# Altium PCB 多通道.PcbDoc (part 1 of 2)
Units mm, origin at the board's own origin, x right, y up, seen from the top; angles counter-clockwise.
Board outline 95 x 34 mm, 2 copper layers (Top Layer, Bottom Layer); 165 components, 129 nets, 558 pads, 145 vias.
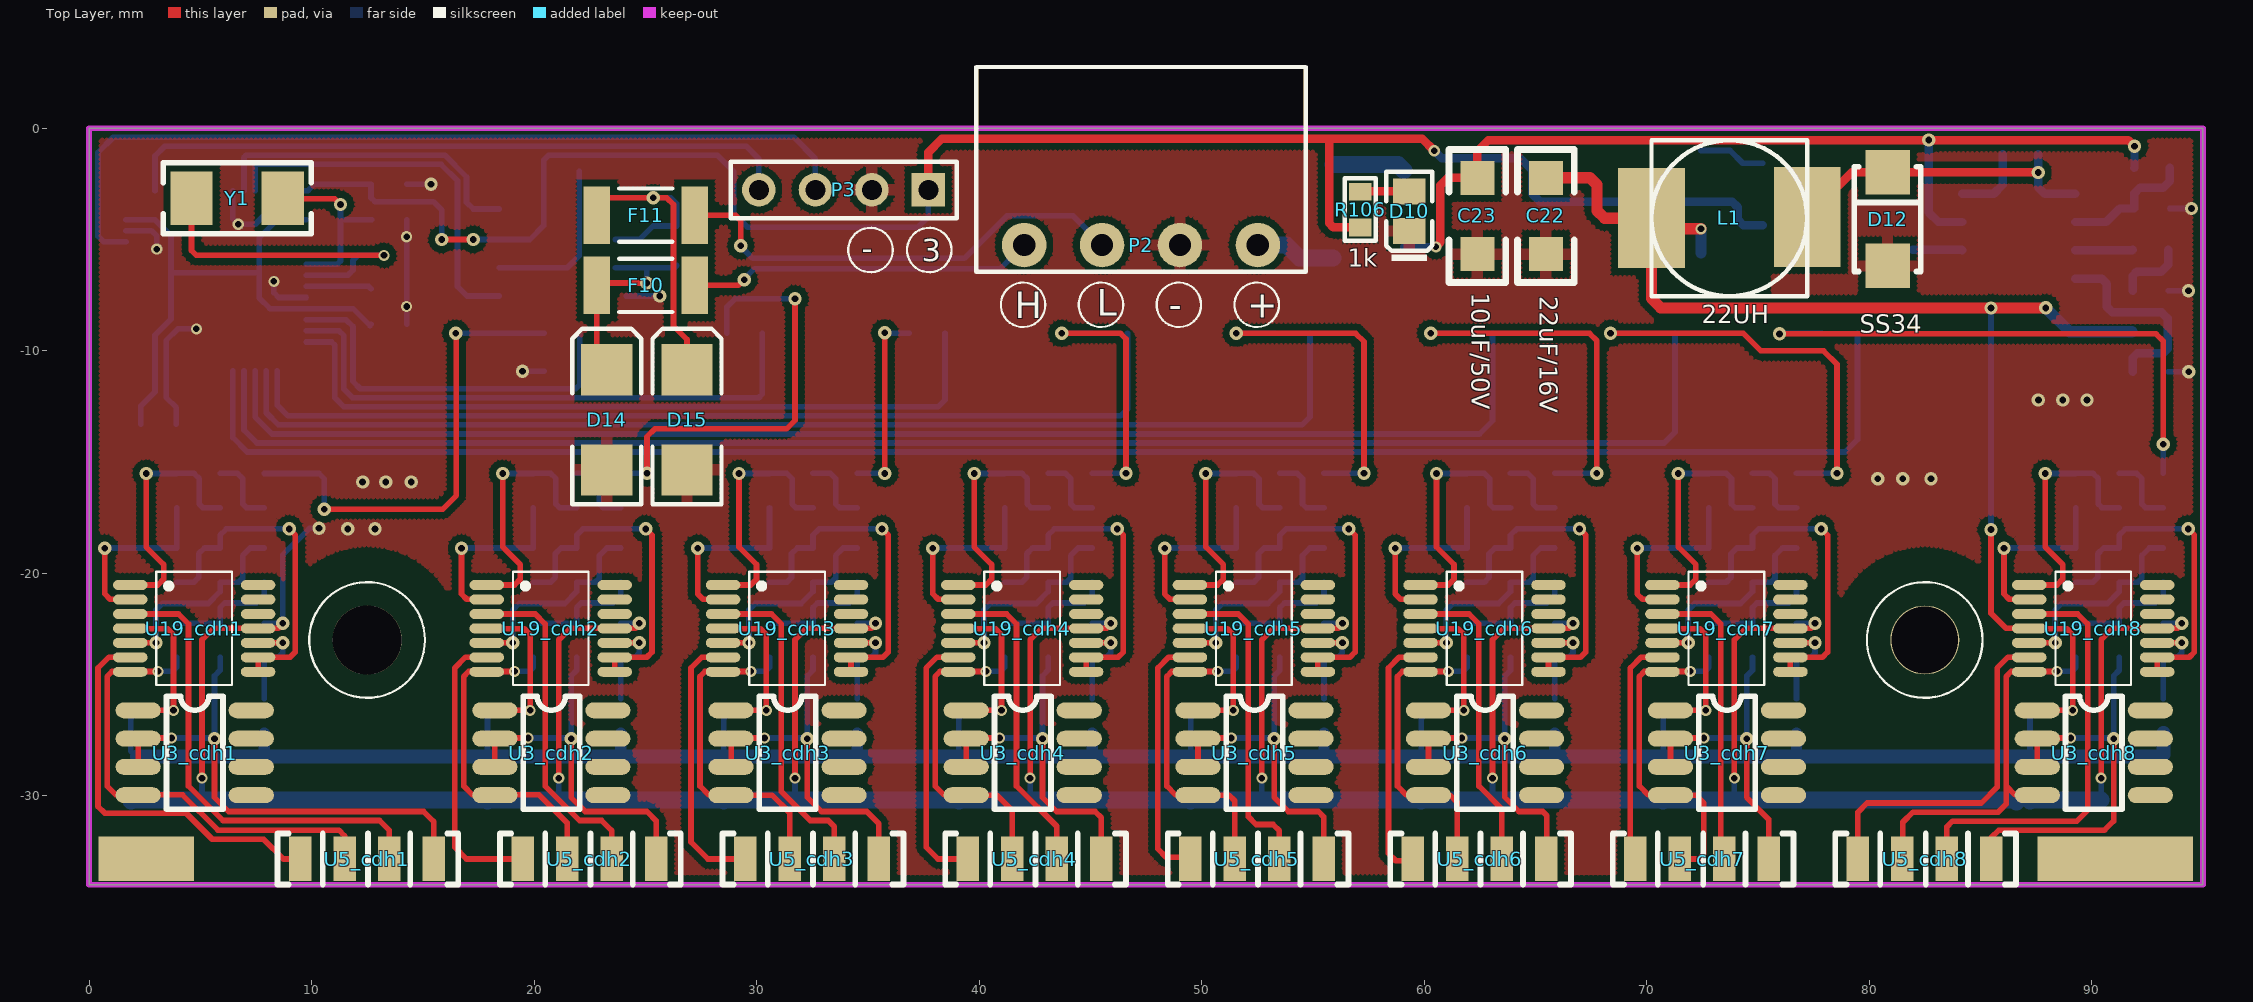
[diagram p0: Top Layer view]
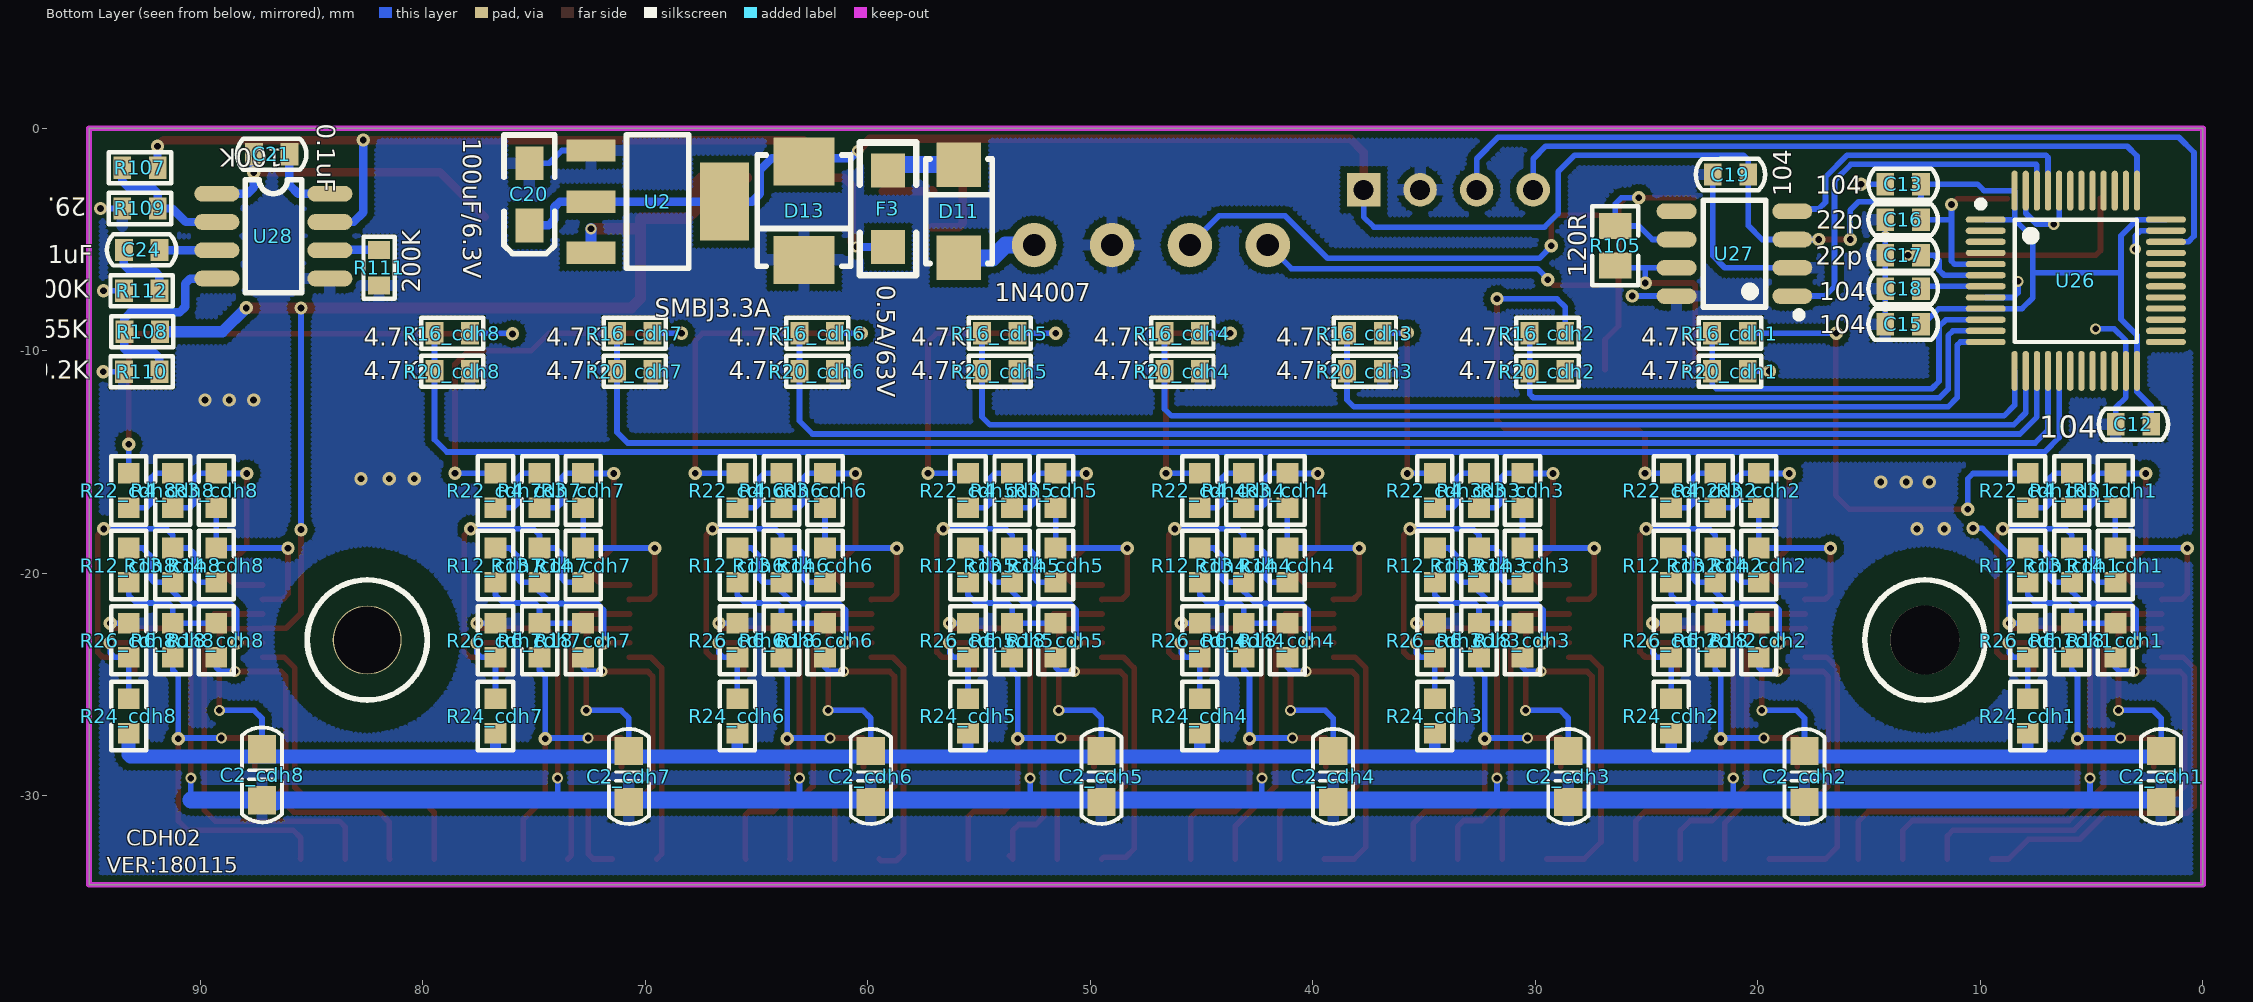
[diagram p1: Bottom Layer view, seen from below]
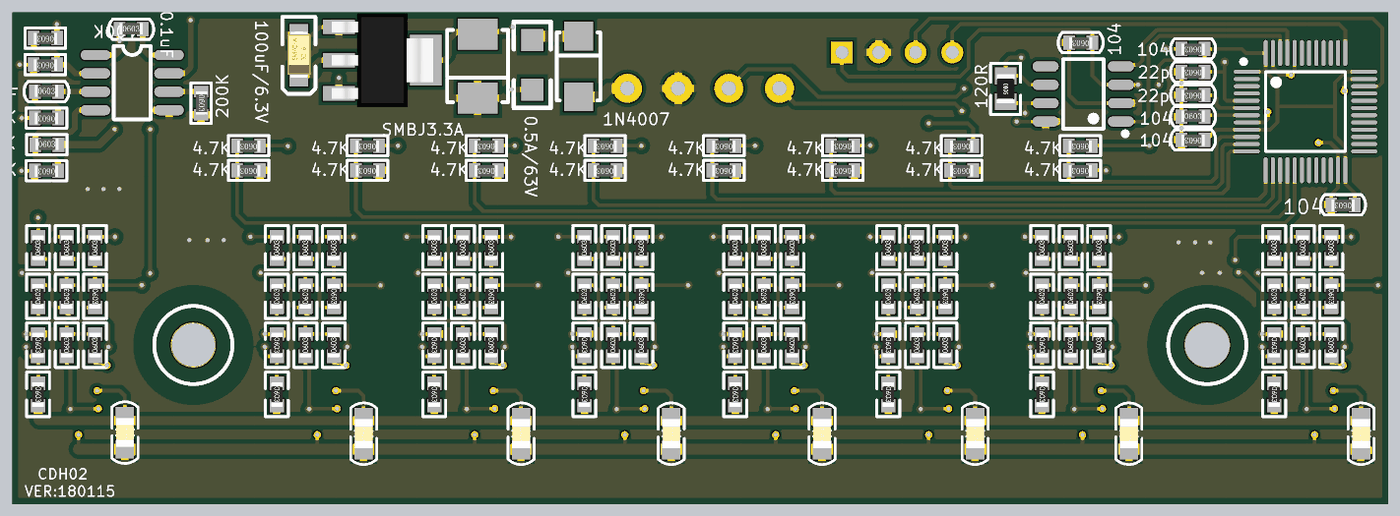
[diagram p3: 3D render of the assembled board from below, using the file's embedded part models]

## Layer stack, top to bottom
Top Layer: signal copper 0.0356
Dielectric: dielectric 0.32, FR-4, Dk 4.8
Bottom Layer: signal copper 0.0356

## Board outline
0,-34 0,0 95,0 95,-34

## Design rules (kind name [scope] priority, off if disabled: settings)
Clearance luosi [HasPad('Free-2')or HasPad('Free-3') vs InPolygon] p1: gap=2.6
Clearance inpolog [InPolygon] p2: gap=0.3
Clearance Clearance_1 [All] p3: gap=0.152
HoleSize [All] p1: absolutevalues=TRUE maxlimit=6 minlimit=0.025 maxpercent=80.000 minpercent=20.000
MinimumSolderMaskSliver [All] p1: minsoldermaskwidth=0
PolygonConnect PolygonConnect_1 [IsVia] p1: connectstyle=Direct reliefconductorwidth=0.254 reliefentries=4 polygonreliefangle="90 Angle"
PolygonConnect [IsPad] p2: connectstyle=Relief reliefconductorwidth=0.508 reliefentries=4 polygonreliefangle="90 Angle"
RoomDefinition 总图 [InComponentClass('总图')] p1: confinementstyle=ConfineIn formatcopy=TRUE lockcomponents=FA outline -414.128,-262.651 -363.328,-262.651 -363.328,-237.251 -414.128,-237.251
RoomDefinition cdh8 [InComponentClass('cdh8')] p2: confinementstyle=ConfineIn formatcopy=TRUE lockcomponents=FALSE outline -414.128,-262.651 -363.328,-262.651 -363.328,-237.251 -414.128,-237.251
RoomDefinition cdh7 [InComponentClass('cdh7')] p3: confinementstyle=ConfineIn formatcopy=TRUE lockcomponents=FALSE outline -414.128,-262.651 -363.328,-262.651 -363.328,-237.251 -414.128,-237.251
RoomDefinition cdh6 [InComponentClass('cdh6')] p4: confinementstyle=ConfineIn formatcopy=TRUE lockcomponents=FALSE outline -414.128,-262.651 -363.328,-262.651 -363.328,-237.251 -414.128,-237.251
RoomDefinition cdh5 [InComponentClass('cdh5')] p5: confinementstyle=ConfineIn formatcopy=TRUE lockcomponents=FALSE outline -414.128,-262.651 -363.328,-262.651 -363.328,-237.251 -414.128,-237.251
RoomDefinition cdh4 [InComponentClass('cdh4')] p6: confinementstyle=ConfineIn formatcopy=TRUE lockcomponents=FALSE outline -414.128,-262.651 -363.328,-262.651 -363.328,-237.251 -414.128,-237.251
RoomDefinition cdh3 [InComponentClass('cdh3')] p7: confinementstyle=ConfineIn formatcopy=TRUE lockcomponents=FALSE outline -414.128,-262.651 -363.328,-262.651 -363.328,-237.251 -414.128,-237.251
RoomDefinition cdh2 [InComponentClass('cdh2')] p8: confinementstyle=ConfineIn formatcopy=TRUE lockcomponents=FALSE outline -414.128,-262.651 -363.328,-262.651 -363.328,-237.251 -414.128,-237.251
RoomDefinition cdh1 [InComponentClass('cdh1')] p9: confinementstyle=ConfineIn formatcopy=TRUE lockcomponents=FALSE outline -414.128,-262.651 -363.328,-262.651 -363.328,-237.251 -414.128,-237.251
RoutingVias [All] p1: holewidth=0.711 width=1.27 viastyle="Through Hole" minholewidth=0.711 minwidth=1.27 maxholewidth=0.711 maxwidth=1.27
SilkToSilkClearance [All] p1: silktosilkclearance=-10
SilkscreenOverComponentPads [IsPad] p1: minsilkscreentomaskgap=-10
SolderMaskExpansion [All] p1: expansion=0.102
Width [All] p1: maxlimit=1.27 minlimit=0.152 preferedwidth=0.254
24 further rules are at their usual default settings.

## Classes and differential pairs
component class 总图: C12 C13 C15 C16 C17 C18 C19 C20 C21 C22 C23 C24 D10 D11 D12 D13 D14 D15 F3 F10 F11 L1 P2 P3 R105 R106 R107 R108 R109 R110 R111 R112 U2 U26 U27 U28 Y1
channel class cdh: cdh1 cdh2 cdh3 cdh4 cdh5 cdh6 cdh7 cdh8
component class cdh1: C2_cdh1 R3_cdh1 R4_cdh1 R6_cdh1 R12_cdh1 R13_cdh1 R14_cdh1 R16_cdh1 R18_cdh1 R20_cdh1 R22_cdh1 R24_cdh1 R26_cdh1 U3_cdh1 U5_cdh1 U19_cdh1
component class cdh4: C2_cdh4 R3_cdh4 R4_cdh4 R6_cdh4 R12_cdh4 R13_cdh4 R14_cdh4 R16_cdh4 R18_cdh4 R20_cdh4 R22_cdh4 R24_cdh4 R26_cdh4 U3_cdh4 U5_cdh4 U19_cdh4
component class cdh7: C2_cdh7 R3_cdh7 R4_cdh7 R6_cdh7 R12_cdh7 R13_cdh7 R14_cdh7 R16_cdh7 R18_cdh7 R20_cdh7 R22_cdh7 R24_cdh7 R26_cdh7 U3_cdh7 U5_cdh7 U19_cdh7
component class cdh8: C2_cdh8 R3_cdh8 R4_cdh8 R6_cdh8 R12_cdh8 R13_cdh8 R14_cdh8 R16_cdh8 R18_cdh8 R20_cdh8 R22_cdh8 R24_cdh8 R26_cdh8 U3_cdh8 U5_cdh8 U19_cdh8
component class cdh2: C2_cdh2 R3_cdh2 R4_cdh2 R6_cdh2 R12_cdh2 R13_cdh2 R14_cdh2 R16_cdh2 R18_cdh2 R20_cdh2 R22_cdh2 R24_cdh2 R26_cdh2 U3_cdh2 U5_cdh2 U19_cdh2
component class cdh3: C2_cdh3 R3_cdh3 R4_cdh3 R6_cdh3 R12_cdh3 R13_cdh3 R14_cdh3 R16_cdh3 R18_cdh3 R20_cdh3 R22_cdh3 R24_cdh3 R26_cdh3 U3_cdh3 U5_cdh3 U19_cdh3
component class cdh5: C2_cdh5 R3_cdh5 R4_cdh5 R6_cdh5 R12_cdh5 R13_cdh5 R14_cdh5 R16_cdh5 R18_cdh5 R20_cdh5 R22_cdh5 R24_cdh5 R26_cdh5 U3_cdh5 U5_cdh5 U19_cdh5
component class cdh6: C2_cdh6 R3_cdh6 R4_cdh6 R6_cdh6 R12_cdh6 R13_cdh6 R14_cdh6 R16_cdh6 R18_cdh6 R20_cdh6 R22_cdh6 R24_cdh6 R26_cdh6 U3_cdh6 U5_cdh6 U19_cdh6
net class CDH[1..8]: CDH1 CDH2 CDH3 CDH4 CDH5 CDH6 CDH7 CDH8

## Components (designator, comment, footprint, x,y, rotation, side; value= is the part's Value field where it differs from the comment)
C2_cdh1 "0.1uF" C0805 1.88,-29.134 r90 bottom (schematic designator C2)
C2_cdh2 "0.1uF" C0805 17.907,-29.134 r90 bottom (schematic designator C2)
C2_cdh3 "0.1uF" C0805 28.524,-29.134 r90 bottom (schematic designator C2)
C2_cdh4 "0.1uF" C0805 39.091,-29.134 r90 bottom (schematic designator C2)
C2_cdh5 "0.1uF" C0805 49.505,-29.134 r90 bottom (schematic designator C2)
C2_cdh6 "0.1uF" C0805 59.868,-29.134 r90 bottom (schematic designator C2)
C2_cdh7 "0.1uF" C0805 70.739,-29.134 r90 bottom (schematic designator C2)
C2_cdh8 "0.1uF" C0805 87.224,-29.058 r90 bottom (schematic designator C2)
C12 "104" 0603-CAP 3.124,-13.31 r0 bottom
C13 "104" 0603-CAP 13.475,-2.515 r0 bottom
C15 "104" 0603-CAP 13.475,-8.814 r0 bottom
C16 "22p" 0603-CAP 13.475,-4.115 r0 bottom
C17 "22p" 0603-CAP 13.475,-5.715 r0 bottom
C18 "104" 0603-CAP 13.475,-7.214 r180 bottom
C19 "104" 0603-CAP 21.234,-2.083 r0 bottom
C20 "100uF/6.3V" 3216 75.209,-2.972 r270 bottom
C21 "0.1uF" 0603-CAP 86.792,-1.168 r180 bottom
C22 "22uF/16V" 1206 65.456,-5.664 r90 top
C23 "10uF/50V" 1206 62.408,-2.224 r270 top
C24 "0.1uF" 0603-CAP 92.634,-5.471 r180 bottom
D10 "LED0" LC-0805_LED_S1 59.334,-2.845 r90 top
D11 "1N4007" SMA(DO-214AC)_S1 55.905,-3.734 r270 bottom
D12 "SS34" SMA(DO-214AC)_S1 80.823,-4.089 r270 top
D13 "SMBJ3.3A" SMB(DO-214AA)_S1 62.865,-3.708 r90 bottom
D14 "D Schottky" SMB 23.266,-13.106 r90 top
D15 "D Schottky" SMB 26.873,-13.106 r90 top
F3 "0.5A/63V" 1206 59.08,-1.905 r270 bottom
F10 "Fuse" 12Z-2010 25.019,-7.061 r180 top
F11 "Fuse" 12Z-2010 25.019,-3.912 r180 top
L1 "22UH" L-7*7*4mm-S 77.216,-7.544 r180 top
P2 "Header 4" DZ-4-3.5 52.527,-5.251 r180 top
P3 "Header 4" HDR1X4 37.719,-2.769 r180 top
R3_cdh1 "200K" 0603_R 3.937,-16.281 r90 bottom (schematic designator R3)
R3_cdh2 "200K" 0603_R 19.964,-16.281 r90 bottom (schematic designator R3)
R3_cdh3 "200K" 0603_R 30.582,-16.281 r90 bottom (schematic designator R3)
R3_cdh4 "200K" 0603_R 41.148,-16.281 r90 bottom (schematic designator R3)
R3_cdh5 "200K" 0603_R 51.562,-16.281 r90 bottom (schematic designator R3)
R3_cdh6 "200K" 0603_R 61.925,-16.281 r90 bottom (schematic designator R3)
R3_cdh7 "200K" 0603_R 72.796,-16.281 r90 bottom (schematic designator R3)
R3_cdh8 "200K" 0603_R 89.281,-16.281 r90 bottom (schematic designator R3)
R4_cdh1 "3K" 0603_R 5.893,-16.281 r90 bottom (schematic designator R4)
R4_cdh2 "3K" 0603_R 21.92,-16.281 r90 bottom (schematic designator R4)
R4_cdh3 "3K" 0603_R 32.537,-16.281 r90 bottom (schematic designator R4)
R4_cdh4 "3K" 0603_R 43.104,-16.281 r90 bottom (schematic designator R4)
R4_cdh5 "3K" 0603_R 53.518,-16.281 r90 bottom (schematic designator R4)
R4_cdh6 "3K" 0603_R 63.881,-16.281 r90 bottom (schematic designator R4)
R4_cdh7 "3K" 0603_R 74.752,-16.281 r90 bottom (schematic designator R4)
R4_cdh8 "3K" 0603_R 91.237,-16.281 r90 bottom (schematic designator R4)
R6_cdh1 "10K" 0603_R 5.893,-23.012 r90 bottom (schematic designator R6)
R6_cdh2 "10K" 0603_R 21.92,-23.012 r90 bottom (schematic designator R6)
R6_cdh3 "10K" 0603_R 32.537,-23.012 r90 bottom (schematic designator R6)
R6_cdh4 "10K" 0603_R 43.104,-23.012 r90 bottom (schematic designator R6)
R6_cdh5 "10K" 0603_R 53.518,-23.012 r90 bottom (schematic designator R6)
R6_cdh6 "10K" 0603_R 63.881,-23.012 r90 bottom (schematic designator R6)
R6_cdh7 "10K" 0603_R 74.752,-23.012 r90 bottom (schematic designator R6)
R6_cdh8 "10K" 0603_R 91.237,-23.012 r90 bottom (schematic designator R6)
R12_cdh1 "30K" 0603_R 7.874,-19.634 r90 bottom (schematic designator R12)
R12_cdh2 "30K" 0603_R 23.901,-19.634 r90 bottom (schematic designator R12)
R12_cdh3 "30K" 0603_R 34.519,-19.634 r90 bottom (schematic designator R12)
R12_cdh4 "30K" 0603_R 45.085,-19.634 r90 bottom (schematic designator R12)
R12_cdh5 "30K" 0603_R 55.499,-19.634 r90 bottom (schematic designator R12)
R12_cdh6 "30K" 0603_R 65.862,-19.634 r90 bottom (schematic designator R12)
R12_cdh7 "30K" 0603_R 76.733,-19.634 r90 bottom (schematic designator R12)
R12_cdh8 "30K" 0603_R 93.218,-19.634 r90 bottom (schematic designator R12)
R13_cdh1 "1K" 0603_R 5.893,-19.634 r90 bottom (schematic designator R13)
R13_cdh2 "1K" 0603_R 21.92,-19.634 r90 bottom (schematic designator R13)
R13_cdh3 "1K" 0603_R 32.537,-19.634 r90 bottom (schematic designator R13)
R13_cdh4 "1K" 0603_R 43.104,-19.634 r90 bottom (schematic designator R13)
R13_cdh5 "1K" 0603_R 53.518,-19.634 r90 bottom (schematic designator R13)
R13_cdh6 "1K" 0603_R 63.881,-19.634 r90 bottom (schematic designator R13)
R13_cdh7 "1K" 0603_R 74.752,-19.634 r90 bottom (schematic designator R13)
R13_cdh8 "1K" 0603_R 91.237,-19.634 r90 bottom (schematic designator R13)
R14_cdh1 "1K" 0603_R 3.937,-19.634 r270 bottom (schematic designator R14)
R14_cdh2 "1K" 0603_R 19.964,-19.634 r270 bottom (schematic designator R14)
R14_cdh3 "1K" 0603_R 30.582,-19.634 r270 bottom (schematic designator R14)
R14_cdh4 "1K" 0603_R 41.148,-19.634 r270 bottom (schematic designator R14)
R14_cdh5 "1K" 0603_R 51.562,-19.634 r270 bottom (schematic designator R14)
R14_cdh6 "1K" 0603_R 61.925,-19.634 r270 bottom (schematic designator R14)
R14_cdh7 "1K" 0603_R 72.796,-19.634 r270 bottom (schematic designator R14)
R14_cdh8 "1K" 0603_R 89.281,-19.634 r270 bottom (schematic designator R14)
R16_cdh1 "4.7K" 0603 21.26,-9.22 r0 bottom (schematic designator R16)
R16_cdh2 "4.7K" 0603 29.462,-9.22 r0 bottom (schematic designator R16)
R16_cdh3 "4.7K" 0603 37.665,-9.22 r0 bottom (schematic designator R16)
R16_cdh4 "4.7K" 0603 45.867,-9.22 r0 bottom (schematic designator R16)
R16_cdh5 "4.7K" 0603 54.069,-9.22 r0 bottom (schematic designator R16)
R16_cdh6 "4.7K" 0603 62.272,-9.22 r0 bottom (schematic designator R16)
R16_cdh7 "4.7K" 0603 70.474,-9.22 r0 bottom (schematic designator R16)
R16_cdh8 "4.7K" 0603 78.676,-9.22 r0 bottom (schematic designator R16)
R18_cdh1 "10K" 0603_R 3.937,-23.012 r90 bottom (schematic designator R18)
R18_cdh2 "10K" 0603_R 19.964,-23.012 r90 bottom (schematic designator R18)
R18_cdh3 "10K" 0603_R 30.582,-23.012 r90 bottom (schematic designator R18)
R18_cdh4 "10K" 0603_R 41.148,-23.012 r90 bottom (schematic designator R18)
R18_cdh5 "10K" 0603_R 51.562,-23.012 r90 bottom (schematic designator R18)
R18_cdh6 "10K" 0603_R 61.925,-23.012 r90 bottom (schematic designator R18)
R18_cdh7 "10K" 0603_R 72.796,-23.012 r90 bottom (schematic designator R18)
R18_cdh8 "10K" 0603_R 89.281,-23.012 r90 bottom (schematic designator R18)
R20_cdh1 "4.7K" 0603 21.26,-10.922 r0 bottom (schematic designator R20)
R20_cdh2 "4.7K" 0603 29.462,-10.922 r0 bottom (schematic designator R20)
R20_cdh3 "4.7K" 0603 37.665,-10.922 r0 bottom (schematic designator R20)
R20_cdh4 "4.7K" 0603 45.867,-10.922 r0 bottom (schematic designator R20)
R20_cdh5 "4.7K" 0603 54.069,-10.922 r0 bottom (schematic designator R20)
R20_cdh6 "4.7K" 0603 62.272,-10.922 r0 bottom (schematic designator R20)
R20_cdh7 "4.7K" 0603 70.474,-10.922 r0 bottom (schematic designator R20)
R20_cdh8 "4.7K" 0603 78.676,-10.922 r0 bottom (schematic designator R20)
R22_cdh1 "4.7K" 0603_R 7.874,-16.281 r90 bottom (schematic designator R22)
R22_cdh2 "4.7K" 0603_R 23.901,-16.281 r90 bottom (schematic designator R22)
R22_cdh3 "4.7K" 0603_R 34.519,-16.281 r90 bottom (schematic designator R22)
R22_cdh4 "4.7K" 0603_R 45.085,-16.281 r90 bottom (schematic designator R22)
R22_cdh5 "4.7K" 0603_R 55.499,-16.281 r90 bottom (schematic designator R22)
R22_cdh6 "4.7K" 0603_R 65.862,-16.281 r90 bottom (schematic designator R22)
R22_cdh7 "4.7K" 0603_R 76.733,-16.281 r90 bottom (schematic designator R22)
R22_cdh8 "4.7K" 0603_R 93.218,-16.281 r90 bottom (schematic designator R22)
R24_cdh1 "10K" 0603_R 7.874,-26.416 r270 bottom (schematic designator R24)
R24_cdh2 "10K" 0603_R 23.901,-26.416 r270 bottom (schematic designator R24)
R24_cdh3 "10K" 0603_R 34.519,-26.416 r270 bottom (schematic designator R24)
R24_cdh4 "10K" 0603_R 45.085,-26.416 r270 bottom (schematic designator R24)
R24_cdh5 "10K" 0603_R 55.499,-26.416 r270 bottom (schematic designator R24)
R24_cdh6 "10K" 0603_R 65.862,-26.416 r270 bottom (schematic designator R24)
R24_cdh7 "10K" 0603_R 76.733,-26.416 r270 bottom (schematic designator R24)
R24_cdh8 "10K" 0603_R 93.218,-26.416 r270 bottom (schematic designator R24)
R26_cdh1 "10K" 0603_R 7.874,-23.012 r270 bottom (schematic designator R26)
R26_cdh2 "10K" 0603_R 23.901,-23.012 r270 bottom (schematic designator R26)
R26_cdh3 "10K" 0603_R 34.519,-23.012 r270 bottom (schematic designator R26)
R26_cdh4 "10K" 0603_R 45.085,-23.012 r270 bottom (schematic designator R26)
R26_cdh5 "10K" 0603_R 55.499,-23.012 r270 bottom (schematic designator R26)
R26_cdh6 "10K" 0603_R 65.862,-23.012 r270 bottom (schematic designator R26)
R26_cdh7 "10K" 0603_R 76.733,-23.012 r270 bottom (schematic designator R26)
R26_cdh8 "10K" 0603_R 93.218,-23.012 r270 bottom (schematic designator R26)
R105 "120R" 0805_R 26.416,-5.283 r270 bottom
R106 "1k" 0603 57.125,-3.658 r90 top
R107 "100K" 0603 92.71,-1.778 r0 bottom
R108 "365K" 0603 92.608,-9.144 r180 bottom
R109 "29.4K" 0603 92.71,-3.609 r0 bottom
R110 "40.2K" 0603 92.634,-10.947 r0 bottom
R111 "200K" 0603 81.966,-6.274 r270 bottom
R112 "100K" 0603 92.634,-7.302 r0 bottom
U2 "AMS1117-3.3" SOT-223 69.444,-3.302 r0 bottom
U3_cdh1 "LM317" SO-8 2.21,-26.162 r0 top (schematic designator U3)
U3_cdh2 "LM317" SO-8 18.237,-26.162 r0 top (schematic designator U3)
U3_cdh3 "LM317" SO-8 28.854,-26.162 r0 top (schematic designator U3)
U3_cdh4 "LM317" SO-8 39.421,-26.162 r0 top (schematic designator U3)
U3_cdh5 "LM317" SO-8 49.835,-26.162 r0 top (schematic designator U3)
U3_cdh6 "LM317" SO-8 60.198,-26.162 r0 top (schematic designator U3)
U3_cdh7 "LM317" SO-8 71.069,-26.162 r0 top (schematic designator U3)
U3_cdh8 "LM317" SO-8 87.554,-26.162 r0 top (schematic designator U3)
U5_cdh1 "Header 4" PIN4 9.487,-32.842 r0 top (schematic designator U5)
U5_cdh2 "Header 4" PIN4 19.487,-32.842 r0 top (schematic designator U5)
U5_cdh3 "Header 4" PIN4 29.487,-32.842 r0 top (schematic designator U5)
U5_cdh4 "Header 4" PIN4 39.487,-32.842 r0 top (schematic designator U5)
U5_cdh5 "Header 4" PIN4 49.487,-32.842 r0 top (schematic designator U5)
U5_cdh6 "Header 4" PIN4 59.487,-32.842 r0 top (schematic designator U5)
U5_cdh7 "Header 4" PIN4 69.487,-32.842 r0 top (schematic designator U5)
U5_cdh8 "Header 4" PIN4 79.487,-32.842 r0 top (schematic designator U5)
U19_cdh1 "TLC2264" TSSOP14 4.724,-22.479 r0 top (schematic designator U19)
U19_cdh2 "TLC2264" TSSOP14 20.752,-22.479 r0 top (schematic designator U19)
U19_cdh3 "TLC2264" TSSOP14 31.369,-22.479 r0 top (schematic designator U19)
U19_cdh4 "TLC2264" TSSOP14 41.935,-22.479 r0 top (schematic designator U19)
U19_cdh5 "TLC2264" TSSOP14 52.349,-22.479 r0 top (schematic designator U19)
U19_cdh6 "TLC2264" TSSOP14 62.713,-22.479 r0 top (schematic designator U19)
U19_cdh7 "TLC2264" TSSOP14 73.584,-22.479 r0 top (schematic designator U19)
U19_cdh8 "TLC2264" TSSOP14 90.068,-22.479 r0 top (schematic designator U19)
U26 "STM32F103C8T6" LC-LQFP-48 5.715,-6.858 r270 bottom
U27 "CAN/SN65HVD230DR" SOIC-8_150mil 21.057,-5.639 r90 bottom
U28 "MP1584" SO-8 89.256,-2.946 r180 bottom
Y1 "8MHz ±20ppm 20pF" SMD-5032_2P 6.655,-3.15 r180 top

## Footprints (in the part's own frame and the unit in brackets; to place one, negate y for a bottom-side part, rotate by r counter-clockwise, add the part's x,y. Pads: shape width x height; smd on the part's side, far side on the other; paste and mask are expansions set on the pad)
12Z-2010 [mm] "Chip Resistor, Body 5.0x2.5mm, IPC High Densi"
  rect 1.2x2.6 smd: 1(-2.2,0) 2(2.2,0)
  silkscreen extent -1.2,-1.2 1.2,1.2, body extent -2.58,-1.33 2.58,1.33, height 0.9
0603 [mm]
  rect 0.8x1 smd: 1(-0.8,0) 2(0.8,0)
  silkscreen extent -1.4,-0.7 1.4,0.7, body extent -0.8,-0.37 0.8,0.43, height 0.45
0603-CAP [mm]
  rect 0.8x1 smd: 1(-0.8,0) 2(0.8,0)
  silkscreen extent -1.56,-0.7 1.56,0.7, body extent -0.8,-0.36 0.8,0.44, height 0.45
0603_R [mm]
  rect 0.93x0.98 smd: 1(-0.77,0) 2(0.77,0)
  silkscreen extent -1.53,-0.79 1.54,0.79, body extent -0.85,-0.4 0.85,0.4, height 0.56
0805_R [mm]
  rect 1.16x1.47 smd: 1(-0.89,0) 2(0.89,0)
  silkscreen extent -1.77,-1.04 1.77,1.03, body extent -1,-0.63 1,0.63, height 0.49
1206 [mil]
  rect 60x60 smd: 1(0.22,-0.6) 2(135.22,-0.6)
  silkscreen extent -50,-51 185,49
3216 [mil]
  rect 60x50 smd: 1(55,0) 2(-55,0)
  silkscreen extent -105,-45 105,45, body extent -65,-31 61,32, height 63
C0805 [mil]
  rect 50x50 smd: 1(-45,0) 2(45,0)
  silkscreen extent -84,-36 84,36, body extent -39,-25 40,24, height 20
DZ-4-3.5 [mm]
  round 2 hole 1: 1(0,0) 2(3.5,0) 3(7,0) 4(10.5,0)
  silkscreen extent -2.15,-8 12.65,1.2
HDR1X4 [mm] "Connector; Hea"
  rect 1.5x1.5 hole 0.9: 1(0,0)
  round 1.5 hole 0.9: 2(2.54,0) 3(5.08,0) 4(7.62,0)
  silkscreen extent -1.27,-1.27 8.89,1.27
L-7*7*4mm-S [mm]
  rect 3x4.5 smd: 1(0,-3.556) 2(7,-3.5)
  silkscreen extent 0,-7 7,0
LC-0805_LED_S1 [mm]
  rect 1.16x1.47 smd: A(0.001,0) K(-1.779,0)
  silkscreen extent -3.13,-1.04 0.88,1.03, body extent -1.9,-0.62 0.12,0.62, height 1.1
LC-LQFP-48 [mm]
  oval 0.28x1.8 smd mask+0.051: 1(-2.75,-4.05) 2(-2.25,-4.05) 3(-1.75,-4.05) 4(-1.25,-4.05) 5(-0.75,-4.05) 6(-0.25,-4.05) 7(0.25,-4.05) 8(0.75,-4.05) 9(1.25,-4.05) 10(1.75,-4.05) 11(2.25,-4.05) 12(2.75,-4.05) 25(2.75,4.05) 26(2.25,4.05) 27(1.75,4.05) 28(1.25,4.05) 29(0.75,4.05) 30(0.25,4.05) 31(-0.25,4.05) 32(-0.75,4.05) 33(-1.25,4.05) 34(-1.75,4.05) 35(-2.25,4.05) 36(-2.75,4.05)
  oval 1.8x0.28 smd mask+0.051: 13(4.05,-2.75) 14(4.05,-2.25) 15(4.05,-1.75) 16(4.05,-1.25) 17(4.05,-0.75) 18(4.05,-0.25) 19(4.05,0.25) 20(4.05,0.75) 21(4.05,1.25) 22(4.05,1.75) 23(4.05,2.25) 24(4.05,2.75) 37(-4.05,2.75) 38(-4.05,2.25) 39(-4.05,1.75) 40(-4.05,1.25) 41(-4.05,0.75) 42(-4.05,0.25) 43(-4.05,-0.25) 44(-4.05,-0.75) 45(-4.05,-1.25) 46(-4.05,-1.75) 47(-4.05,-2.25) 48(-4.05,-2.75)
  silkscreen extent -3.6,-4.43 2.75,2.75
PIN4 [mm]
  rect 1x2 smd: 1(0,0) 2(2,0) 3(4,0) 4(6,0)
  silkscreen extent -1.02,-1.14 7.11,1.14
SMA(DO-214AC)_S1 [mm]
  rect 2x2 smd: 1(2.1,0) 2(-2.1,0)
  silkscreen extent -2.35,-1.5 2.35,1.5
SMB [mm] "DO-214-AA/SMB; 2 C-Bend Leads; Body 5.3 x 3.6 mm, inc. leads (Lx"
  rect 2.3x2.3 smd: 1(-2.25,0) 2(2.25,0)
  silkscreen extent -3.8,-1.55 4.1,1.55
SMB(DO-214AA)_S1 [mm]
  rect 2.159x2.743 smd: 1(2.21,0) 2(-2.21,0)
  silkscreen extent -2.5,-2.1 2.5,2.1
SMD-5032_2P [mm]
  rect 1.9x2.4 smd: 1(-2.05,0) 2(2.05,0)
  silkscreen extent -3.32,-1.6 3.32,1.6
SO-8 [mil]
  oval 80x28 smd: 1(0,0) 2(0,-50) 3(0,-100) 4(0,-150) 5(200,-150) 6(200,-100) 7(200,-50) 8(200,0)
  silkscreen extent 50,-175 150,25
SOIC-8_150mil [mm]
  oval 0.7x1.8 smd: 1(-1.905,-2.6) 2(-0.635,-2.6) 3(0.635,-2.6) 4(1.905,-2.6) 5(1.905,2.6) 6(0.635,2.6) 7(-0.635,2.6) 8(-1.905,2.6)
  silkscreen extent -2.9,-3.05 2.4,1.4
SOT-223 [mm]
  rect 2.2x1 smd: 1(3,-2.3) 2(3,0) 3(3,2.3)
  rect 2.2x3.5 smd: 2(-3,0)
  silkscreen extent -1.4,-3 1.4,3, body extent -3.49,-3.24 3.49,3.24, height 1.64
TSSOP14 [mm]
  oval 1.55x0.45 smd: 1(-2.875,1.95) 2(-2.875,1.3) 3(-2.875,0.65) 4(-2.875,0) 5(-2.875,-0.65) 6(-2.875,-1.3) 7(-2.875,-1.95) 8(2.875,-1.95) 9(2.875,-1.3) 10(2.875,-0.65) 11(2.875,0) 12(2.875,0.65) 13(2.875,1.3) 14(2.875,1.95)
  silkscreen extent -1.7,-2.55 1.7,2.55, body extent -2.25,-2.55 2.25,2.55, height 2.65

## Part data
C2_cdh1 C2_cdh2 C2_cdh3 C2_cdh4 C2_cdh5 C2_cdh6 C2_cdh7 C2_cdh8 C21 C22 C23 C24: library part "Cap Semi", "Capacitor (Semiconductor SIM Model"
C12 C13 C15 C16 C17: library part Cap, "Capacito"
C20: library part CA
D10: "Typical INFRARED GaA"
D11: library part Diode, "Default Diod"
D12: library part "D Zener", "Zener Diod"
D13: library part "Diode 18TQ045", "Schottky Rectifie"
D14 D15: "Schottky Diode"
F3: library part "Fuse 1", "Fus"
F10 F11: library part "Fuse 2"
L1: library part Inductor, "Inducto"
P2: "Header, 4-"
P3: "Header, 4-Pin"
R3_cdh1 R3_cdh2 R3_cdh3 R3_cdh4 R3_cdh5 R3_cdh6 R3_cdh7 R3_cdh8 R4_cdh1 R4_cdh2 R4_cdh3 R4_cdh4 R4_cdh5 R4_cdh6 R4_cdh7 R4_cdh8 R6_cdh1 R6_cdh2 R6_cdh3 R6_cdh4 R6_cdh5 R6_cdh6 R6_cdh7 R6_cdh8 R12_cdh1 R12_cdh2 R12_cdh3 R12_cdh4 R12_cdh5 R12_cdh6 R12_cdh7 R12_cdh8 R13_cdh1 R13_cdh2 R13_cdh3 R13_cdh4 R13_cdh5 R13_cdh6 R13_cdh7 R13_cdh8 R14_cdh1 R14_cdh2 R14_cdh3 R14_cdh4 R14_cdh5 R14_cdh6 R14_cdh7 R14_cdh8 R16_cdh1 R16_cdh2 R16_cdh3 R16_cdh4 R16_cdh5 R16_cdh6 R16_cdh7 R16_cdh8 R18_cdh1 R18_cdh2 R18_cdh3 R18_cdh4 R18_cdh5 R18_cdh6 R18_cdh7 R18_cdh8 R20_cdh1 R20_cdh2 R20_cdh3 R20_cdh4 R20_cdh5 R20_cdh6 R20_cdh7 R20_cdh8 R22_cdh1 R22_cdh2 R22_cdh3 R22_cdh4 R22_cdh5 R22_cdh6 R22_cdh7 R22_cdh8 R24_cdh1 R24_cdh2 R24_cdh3 R24_cdh4 R24_cdh5 R24_cdh6 R24_cdh7 R24_cdh8 R26_cdh1 R26_cdh2 R26_cdh3 R26_cdh4 R26_cdh5 R26_cdh6 R26_cdh7 R26_cdh8: library part Res2, "Resisto"
U2: library part "SOT-223 AMS1117-3.3", "低压差线性Î"
U3_cdh1 U3_cdh2 U3_cdh3 U3_cdh4 U3_cdh5 U3_cdh6 U3_cdh7 U3_cdh8: "L"
U5_cdh1 U5_cdh2 U5_cdh3 U5_cdh4 U5_cdh5 U5_cdh6 U5_cdh7 U5_cdh8: "Header, 4-Pi"
U19_cdh1 U19_cdh2 U19_cdh3 U19_cdh4 U19_cdh5 U19_cdh6 U19_cdh7 U19_cdh8: library part TLC226
U26: library part stm32f103v8t
U27: library part CAN/SN65HVD230DR_[C12084], "CA"
U28: library part MP15
Y1: library part "SMD-5032_2P 8MHz 20ppm 20pF", "贴Æ"

## Free pads (board coordinates)
  rect 4.3x2 smd: 0(2.565,-32.842)
  rect 7x2 smd: 0(91.059,-32.842)
  round 3.1 hole 3.1: 2(12.497,-23)
  round 3.1 hole 3: 3(82.497,-23)

## Via types
v1: diameter 0.6, hole 0.3, Top Layer to Bottom Layer, tented both sides, 103 vias
v2: diameter 0.5, hole 0.3, Top Layer to Bottom Layer, 39 vias
v3: diameter 0.5, hole 0.3, Top Layer to Bottom Layer, tented both sides, 3 vias

## Nets (pads, with @x,y where several pads share a name; then routed paths per layer and width w, separated by ;. In a path a pad name is that pad's centre, name@x,y a point inside that pad or via, vN(x,y) a via of type N, cw(c..) or ccw(c..) an arc to the next point about the centre after c; other vN are vias at no path point)
CAN_H: F10.1 P2.4 | length 15.7
  Top Layer w0.254: F10.1@27.219,-7.061 29.185,-7.061 v1(29.439,-6.807)
  Bottom Layer w0.254: v1@29.362,-6.858 29.909,-6.312 40.967,-6.312 P2.4@42.027,-5.251
CAN_L: F11.1 P2.3 | length 21.1
  Top Layer w0.254: F11.1@27.219,-3.912 29.058,-3.912 29.286,-4.14 v1(29.286,-5.283)
  Bottom Layer w0.254: v1@29.286,-5.309 29.82,-5.842 39.345,-5.842 41.25,-3.937 44.213,-3.937 P2.3@45.527,-5.251
CAN_RX: U26.45 U27.4 | length 14.7
  Bottom Layer w0.254: U26.45@6.965,-2.808 6.965,-1.315 7.061,-1.219 15.993,-1.219 16.967,-2.194 16.967,-3.327 17.272,-3.632 U27.4@18.44,-3.632
CAN_TX: U26.46 U27.1 | length 17.4
  Bottom Layer w0.254: U26.46@7.465,-2.808 7.465,-1.654 7.493,-1.626 15.824,-1.626 16.561,-2.362 16.561,-7.112 16.993,-7.544 U27.1@18.44,-7.544
CDH1: R16_cdh1.2 R20_cdh1.2 U26.10 | length 17.4
  Bottom Layer w0.254: U26.10@9.765,-8.608 11.554,-8.608 11.862,-8.915 11.862,-11.379 12.192,-11.709 21.869,-11.709 22.06,-11.519 R20_cdh1.2@22.06,-10.922 R16_cdh1.2@22.06,-9.22
CDH2: R16_cdh2.2 R20_cdh2.2 U26.11 | length 26
  Bottom Layer w0.254: U26.11@9.765,-9.108 11.242,-9.108 11.455,-9.322 11.455,-11.735 11.836,-12.116 30.099,-12.116 30.262,-11.953 R20_cdh2.2@30.262,-10.922 R16_cdh2.2@30.262,-9.22
CDH3: R16_cdh3.2 R20_cdh3.2 U26.12 | length 34.4
  Bottom Layer w0.254: U26.12@9.765,-9.608 10.903,-9.608 11.049,-9.754 11.049,-12.116 11.455,-12.522 38.151,-12.522 38.465,-12.208 R20_cdh3.2@38.465,-10.922 R16_cdh3.2@38.465,-9.22
CDH4: R16_cdh4.2 R20_cdh4.2 U26.13 | length 43.5
  Bottom Layer w0.254: U26.13@8.465,-10.908 8.465,-12.453 8.941,-12.929 46.355,-12.929 46.667,-12.617 R20_cdh4.2@46.667,-10.922 R16_cdh4.2@46.667,-9.22
CDH5: R16_cdh5.2 R20_cdh5.2 U26.14 | length 52.9
  Bottom Layer w0.254: U26.14@7.965,-10.908 7.965,-12.791 8.509,-13.335 54.508,-13.335 54.869,-12.974 R20_cdh5.2@54.869,-10.922 R16_cdh5.2@54.869,-9.22
CDH6: R16_cdh6.2 R20_cdh6.2 U26.15 | length 62.2
  Bottom Layer w0.254: U26.15@7.465,-10.908 7.465,-12.977 8.23,-13.741 62.484,-13.741 63.072,-13.154 R20_cdh6.2@63.072,-10.922 R16_cdh6.2@63.072,-9.22
CDH7: R16_cdh7.2 R20_cdh7.2 U26.16 | length 71.9
  Bottom Layer w0.254: U26.16@6.965,-10.908 6.965,-13.569 7.544,-14.148 70.79,-14.148 71.274,-13.664 R20_cdh7.2@71.274,-10.922 R16_cdh7.2@71.274,-9.22
CDH8: R16_cdh8.2 R20_cdh8.2 U26.17 | length 81.3
  Bottom Layer w0.254: U26.17@6.465,-10.908 6.465,-13.907 7.112,-14.554 78.918,-14.554 79.476,-13.996 R20_cdh8.2@79.476,-10.922 R16_cdh8.2@79.476,-9.22
GND: C2_cdh1.1 C2_cdh2.1 C2_cdh3.1 C2_cdh4.1 C2_cdh5.1 C2_cdh6.1 C2_cdh7.1 C2_cdh8.1 C12.2 C13.2 C15.2 C16.2 C17.2 C18.1 C19.2 C20.2 C22.1 C23.2 D10.K D12.1 D13.2 D14.1 D15.1 P2.2 P3.2 R20_cdh1.1 R20_cdh2.1 R20_cdh3.1 R20_cdh4.1 R20_cdh5.1 R20_cdh6.1 R20_cdh7.1 R20_cdh8.1 R26_cdh1.1 R26_cdh2.1 R26_cdh3.1 R26_cdh4.1 R26_cdh5.1 R26_cdh6.1 R26_cdh7.1 R26_cdh8.1 R109.2 R110.2 R111.2 R112.2 U2.1 U19_cdh1.11 U19_cdh2.11 U19_cdh3.11 U19_cdh4.11 U19_cdh5.11 U19_cdh6.11 U19_cdh7.11 U19_cdh8.11 U26.8 U26.23 U26.35 U26.44 U26.47 U27.2 U27.8 U28.5 | length 225.2
  Top Layer w0.254: v2(5.08,-29.21) 5.08,-22.987 5.588,-22.479 U19_cdh1.11@7.599,-22.479 8.518,-22.479 v1@8.755,-22.242 ; v2(21.107,-29.21) 21.107,-22.987 21.615,-22.479 U19_cdh2.11@23.627,-22.479 24.546,-22.479 v1@24.782,-22.242 ; v2(31.725,-29.21) 31.725,-22.987 32.233,-22.479 U19_cdh3.11@34.244,-22.479 35.163,-22.479 v1@35.4,-22.242 ; v2(42.291,-29.21) 42.291,-22.987 42.799,-22.479 U19_cdh4.11@44.81,-22.479 45.729,-22.479 v1@45.966,-22.242 ; v2(52.705,-29.21) 52.705,-22.987 53.213,-22.479 U19_cdh5.11@55.224,-22.479 56.143,-22.479 v1@56.38,-22.242 ; v2(63.068,-29.21) 63.068,-22.987 63.576,-22.479 U19_cdh6.11@65.588,-22.479 66.507,-22.479 v1@66.743,-22.242 ; v2(73.939,-29.21) 73.939,-22.987 74.447,-22.479 U19_cdh7.11@76.459,-22.479 77.378,-22.479 v1@77.614,-22.242 ; v2(90.424,-29.21) 90.424,-22.987 90.932,-22.479 U19_cdh8.11@92.943,-22.479 93.862,-22.479 v1@94.099,-22.242
  Bottom Layer w0.254: U26.35@1.665,-4.608 2.805,-4.608 3.048,-4.851 3.042,-4.858 v2(3.042,-5.436) ; C12.2@3.924,-13.31 3.924,-12.56 3.465,-12.101 U26.23@3.465,-10.908 3.465,-9.54 3.988,-9.017 v2(4.826,-9.017) ; 5.08,-30.201 v2(5.08,-29.21) ; U26.44@6.465,-2.808 6.465,-4.077 v2(6.706,-4.318) 7.468,-4.318 7.965,-3.821 U26.47@7.965,-2.808 ; R26_cdh1.1@7.874,-22.242 v1(8.702,-22.242) 8.702,-19.187 9.906,-17.983 v1(10.338,-17.983) ; v2(8.306,-6.883) 8.306,-7.391 8.522,-7.608 U26.8@9.765,-7.608 ; v2@14.254,-7.993 v2(14.275,-8.014) ; C15.2@14.275,-8.814 v2(14.275,-8.014) ; C16.2@14.275,-4.115 C17.2@14.275,-5.715 C18.1@14.275,-7.214 v2(14.275,-8.014) ; C13.2@14.275,-2.515 v1(15.367,-2.515) ; v2@14.313,-7.976 v2(14.275,-8.014) ; U27.2@18.44,-6.274 21.488,-6.274 22.034,-5.728 C19.2@22.034,-1.93 ; v1(19.482,-10.922) R20_cdh1.1@20.46,-10.922 ; 21.107,-30.201 v2(21.107,-29.21) ; R26_cdh2.1@23.901,-22.242 v1(24.729,-22.242) ; U27.8@24.14,-7.544 v1(25.654,-7.544) ; 31.725,-30.201 v2(31.725,-29.21) ; R26_cdh3.1@34.519,-22.242 v1(35.346,-22.242) ; 42.291,-30.201 v2(42.291,-29.21) ; R26_cdh4.1@45.085,-22.242 v1(45.913,-22.242) ; 52.705,-30.201 v2(52.705,-29.21) ; R26_cdh5.1@55.499,-22.242 v1(56.327,-22.242) ; 63.068,-30.201 v2(63.068,-29.21) ; R26_cdh6.1@65.862,-22.242 v1(66.69,-22.242) ; U2.1@72.444,-1.002 73.748,-1.002 74.32,-1.575 C20.2@75.209,-1.575 ; 73.939,-30.201 v2(73.939,-29.21) ; R26_cdh7.1@76.733,-22.242 v1(77.561,-22.242) ; 90.424,-30.201 v2(90.424,-29.21) ; R26_cdh8.1@93.218,-22.242 v1(94.046,-22.242) ; R110.2@93.434,-10.947 v1(94.361,-10.947) ; R112.2@93.434,-7.303 v1(94.348,-7.303) ; R109.2@93.51,-3.609 v1(94.485,-3.609)
  Bottom Layer w0.762: C2_cdh1.1@1.88,-30.226 1.905,-30.201 5.08,-30.201 C2_cdh8.1@86.614,-30.201 ; C2_cdh2.1@17.907,-30.226 C2_cdh2.1@17.932,-30.201 ; C2_cdh3.1@28.524,-30.226 C2_cdh3.1@28.55,-30.201 ; C2_cdh4.1@39.091,-30.226 C2_cdh4.1@39.116,-30.201 ; C2_cdh5.1@49.505,-30.226 C2_cdh5.1@49.53,-30.201 ; C2_cdh6.1@59.868,-30.226 C2_cdh6.1@59.893,-30.201 ; C2_cdh7.1@70.739,-30.226 C2_cdh7.1@70.764,-30.201 ; C2_cdh8.1@86.614,-30.277 C2_cdh8.1@86.69,-30.201 ; C2_cdh8.1@87.224,-30.226 87.249,-30.201 90.424,-30.201
  other v1: 11.633,-18.009 12.852,-18.009 12.294,-15.9 13.335,-15.9 14.478,-15.9 80.391,-15.748 81.509,-15.748 82.779,-15.748 87.605,-12.217 88.697,-12.217 89.789,-12.217
  other v2: 14.275,-4.877
H1_IN1_cdh1: R6_cdh1.1 U3_cdh1.2 U3_cdh1.3 U5_cdh1.4 | length 23.1
  Top Layer w0.254: U3_cdh1.3@2.21,-28.702 U3_cdh1.2@2.21,-27.432 2.235,-27.407 v2(3.708,-27.407) ; v1(5.639,-27.432) 5.639,-30.074 6.274,-30.709 15.037,-30.709 15.487,-31.159 U5_cdh1.4@15.487,-32.842
  Bottom Layer w0.254: v2(3.708,-27.407) 5.613,-27.407 v1(5.639,-27.432) 5.639,-24.613 5.893,-24.359 R6_cdh1.1@5.893,-23.782
H1_IN1_cdh2: R6_cdh2.1 U3_cdh2.2 U3_cdh2.3 U5_cdh2.4 | length 17.1
  Top Layer w0.254: U3_cdh2.3@18.237,-28.702 U3_cdh2.2@18.237,-27.432 18.263,-27.407 v2(19.736,-27.407) ; v1(21.666,-27.432) 21.666,-30.074 22.301,-30.709 25.07,-30.709 ; 25.095,-30.734 25.487,-31.126 U5_cdh2.4@25.487,-32.842
  Bottom Layer w0.254: v2(19.736,-27.407) 21.641,-27.407 v1(21.666,-27.432) 21.666,-24.613 21.92,-24.359 R6_cdh2.1@21.92,-23.782
H1_IN1_cdh3: R6_cdh3.1 U3_cdh3.2 U3_cdh3.3 U5_cdh3.4 | length 16.4
  Top Layer w0.254: U3_cdh3.3@28.854,-28.702 U3_cdh3.2@28.854,-27.432 28.88,-27.407 v2(30.353,-27.407) ; v1(32.283,-27.432) 32.283,-30.074 32.918,-30.709 34.95,-30.709 35.487,-31.246 U5_cdh3.4@35.487,-32.842
  Bottom Layer w0.254: v2(30.353,-27.407) 32.258,-27.407 v1(32.283,-27.432) 32.283,-24.613 32.537,-24.359 R6_cdh3.1@32.537,-23.782
H1_IN1_cdh4: R6_cdh4.1 U3_cdh4.2 U3_cdh4.3 U5_cdh4.4 | length 16
  Top Layer w0.254: U3_cdh4.3@39.421,-28.702 U3_cdh4.2@39.421,-27.432 39.446,-27.407 v2(40.919,-27.407) ; v1(42.85,-27.432) 42.85,-30.074 43.485,-30.709 45.212,-30.709 45.487,-30.984 U5_cdh4.4@45.487,-32.842
  Bottom Layer w0.254: v2(40.919,-27.407) 42.824,-27.407 v1(42.85,-27.432) 42.85,-24.613 43.104,-24.359 R6_cdh4.1@43.104,-23.782
H1_IN1_cdh5: R6_cdh5.1 U3_cdh5.2 U3_cdh5.3 U5_cdh5.4 | length 15.6
  Top Layer w0.254: U3_cdh5.3@49.835,-28.702 U3_cdh5.2@49.835,-27.432 49.86,-27.407 v2(51.333,-27.407) ; v1(53.264,-27.432) 53.264,-30.074 53.899,-30.709 55.245,-30.709 55.487,-30.951 U5_cdh5.4@55.487,-32.842
  Bottom Layer w0.254: v2(51.333,-27.407) 53.238,-27.407 v1(53.264,-27.432) 53.264,-24.613 53.518,-24.359 R6_cdh5.1@53.518,-23.782
H1_IN1_cdh6: R6_cdh6.1 U3_cdh6.2 U3_cdh6.3 U5_cdh6.4 | length 15.3
  Top Layer w0.254: U3_cdh6.3@60.198,-28.702 U3_cdh6.2@60.198,-27.432 60.223,-27.407 v2(61.697,-27.407) ; v1(63.627,-27.432) 63.627,-30.074 64.262,-30.709 65.329,-30.709 65.507,-30.886 65.507,-32.823 U5_cdh6.4@65.487,-32.842
  Bottom Layer w0.254: v2(61.697,-27.407) 63.602,-27.407 v1(63.627,-27.432) 63.627,-24.613 63.881,-24.359 R6_cdh6.1@63.881,-23.782
H1_IN1_cdh7: R6_cdh7.1 U3_cdh7.2 U3_cdh7.3 U5_cdh7.4 | length 14.3
  Top Layer w0.254: U3_cdh7.3@71.069,-28.702 U3_cdh7.2@71.069,-27.432 71.095,-27.407 v2(72.568,-27.407) ; v1(74.498,-27.432) 74.498,-30.074 75.487,-31.063 U5_cdh7.4@75.487,-32.842
  Bottom Layer w0.254: v2(72.568,-27.407) 74.473,-27.407 v1(74.498,-27.432) 74.498,-24.613 74.752,-24.359 R6_cdh7.1@74.752,-23.782
H1_IN1_cdh8: R6_cdh8.1 U3_cdh8.2 U3_cdh8.3 U5_cdh8.4 | length 19
  Top Layer w0.254: U5_cdh8.4@85.513,-32.817 U5_cdh8.4@85.487,-32.842 85.487,-31.886 85.827,-31.547 90.576,-31.547 90.983,-31.14 v1(90.983,-27.432) ; U3_cdh8.3@87.554,-28.702 U3_cdh8.2@87.554,-27.432 87.579,-27.407 v2(89.052,-27.407)
  Bottom Layer w0.254: v2(89.052,-27.407) 90.957,-27.407 v1(90.983,-27.432) 90.983,-24.613 91.237,-24.359 R6_cdh8.1@91.237,-23.782
H1_IN3_cdh1: R18_cdh1.1 U3_cdh1.4 U5_cdh1.2 U19_cdh1.7 | length 21.3
  Top Layer w0.254: v2@3.09,-24.418 1.032,-24.418 0.813,-24.638 0.813,-29.566 1.209,-29.961 4.206,-29.961 5.791,-31.547 11.227,-31.547 11.487,-31.807 U5_cdh1.2@11.487,-32.842 ; v2@3.09,-24.409 v2(3.099,-24.409)
  Bottom Layer w0.254: v2(3.099,-24.409) 3.759,-24.409 3.937,-24.232 R18_cdh1.1@3.937,-23.782
H1_IN3_cdh2: R18_cdh2.1 U3_cdh2.4 U5_cdh2.2 U19_cdh2.7 | length 15.6
  Top Layer w0.254: v2@19.117,-24.418 17.06,-24.418 16.84,-24.638 16.84,-29.566 17.236,-29.961 20.233,-29.961 21.487,-31.216 U5_cdh2.2@21.487,-32.842 ; v2@19.117,-24.409 v2(19.126,-24.409)
  Bottom Layer w0.254: v2(19.126,-24.409) 19.787,-24.409 19.964,-24.232 R18_cdh2.1@19.964,-23.782
H1_IN3_cdh3: R18_cdh3.1 U3_cdh3.4 U5_cdh3.2 U19_cdh3.7 | length 15.3
  Top Layer w0.254: U3_cdh3.4@28.854,-29.972 30.693,-29.972 31.487,-30.767 U5_cdh3.2@31.487,-32.842 ; U3_cdh3.4@28.854,-29.961 27.853,-29.961 27.457,-29.566 27.457,-24.638 27.677,-24.418 v2@29.734,-24.418 ; v2@29.734,-24.409 v2(29.743,-24.409)
  Bottom Layer w0.254: v2(29.743,-24.409) 30.404,-24.409 30.582,-24.232 R18_cdh3.1@30.582,-23.782
H1_IN3_cdh4: R18_cdh4.1 U3_cdh4.4 U5_cdh4.2 U19_cdh4.7 | length 14.8
  Top Layer w0.254: U3_cdh4.4@39.421,-29.972 40.792,-29.972 41.487,-30.667 U5_cdh4.2@41.487,-32.842 ; U3_cdh4.4@39.421,-29.961 38.42,-29.961 38.024,-29.566 38.024,-24.638 38.243,-24.418 v2@40.301,-24.418 ; v2@40.301,-24.409 v2(40.31,-24.409)
  Bottom Layer w0.254: v2(40.31,-24.409) 40.97,-24.409 41.148,-24.232 R18_cdh4.1@41.148,-23.782
H1_IN3_cdh5: R18_cdh5.1 U3_cdh5.4 U5_cdh5.2 U19_cdh5.7 | length 14.6
  Top Layer w0.254: U3_cdh5.4@49.835,-29.972 51.232,-29.972 51.487,-30.228 U5_cdh5.2@51.487,-32.842 ; U3_cdh5.4@49.835,-29.961 48.834,-29.961 48.438,-29.566 48.438,-24.638 48.657,-24.418 v2@50.715,-24.418 ; v2@50.715,-24.409 v2(50.724,-24.409)
  Bottom Layer w0.254: v2(50.724,-24.409) 51.384,-24.409 51.562,-24.232 R18_cdh5.1@51.562,-23.782
H1_IN3_cdh6: R18_cdh6.1 U3_cdh6.4 U5_cdh6.2 U19_cdh6.7 | length 14.2
  Top Layer w0.254: U3_cdh6.4@60.198,-29.972 61.163,-29.972 61.487,-30.296 U5_cdh6.2@61.487,-32.842 ; U3_cdh6.4@60.198,-29.961 59.197,-29.961 58.801,-29.566 58.801,-24.638 59.021,-24.418 v2@61.078,-24.418 ; v2@61.078,-24.409 v2(61.087,-24.409)
  Bottom Layer w0.254: v2(61.087,-24.409) 61.747,-24.409 61.925,-24.232 R18_cdh6.1@61.925,-23.782
H1_IN3_cdh7: R18_cdh7.1 U3_cdh7.4 U5_cdh7.2 U19_cdh7.7 | length 15.3
  Top Layer w0.254: U3_cdh7.4@71.069,-29.972 72.212,-29.972 72.568,-30.328 72.568,-32.614 72.339,-32.842 U5_cdh7.2@71.487,-32.842 ; U3_cdh7.4@71.069,-29.961 70.068,-29.961 69.672,-29.566 69.672,-24.638 69.892,-24.418 v2@71.949,-24.418 ; v2@71.949,-24.409 v2(71.958,-24.409)
  Bottom Layer w0.254: v2(71.958,-24.409) 72.619,-24.409 72.796,-24.232 R18_cdh7.1@72.796,-23.782